# EAGLE board LED blinker (EAGLE 5.11)
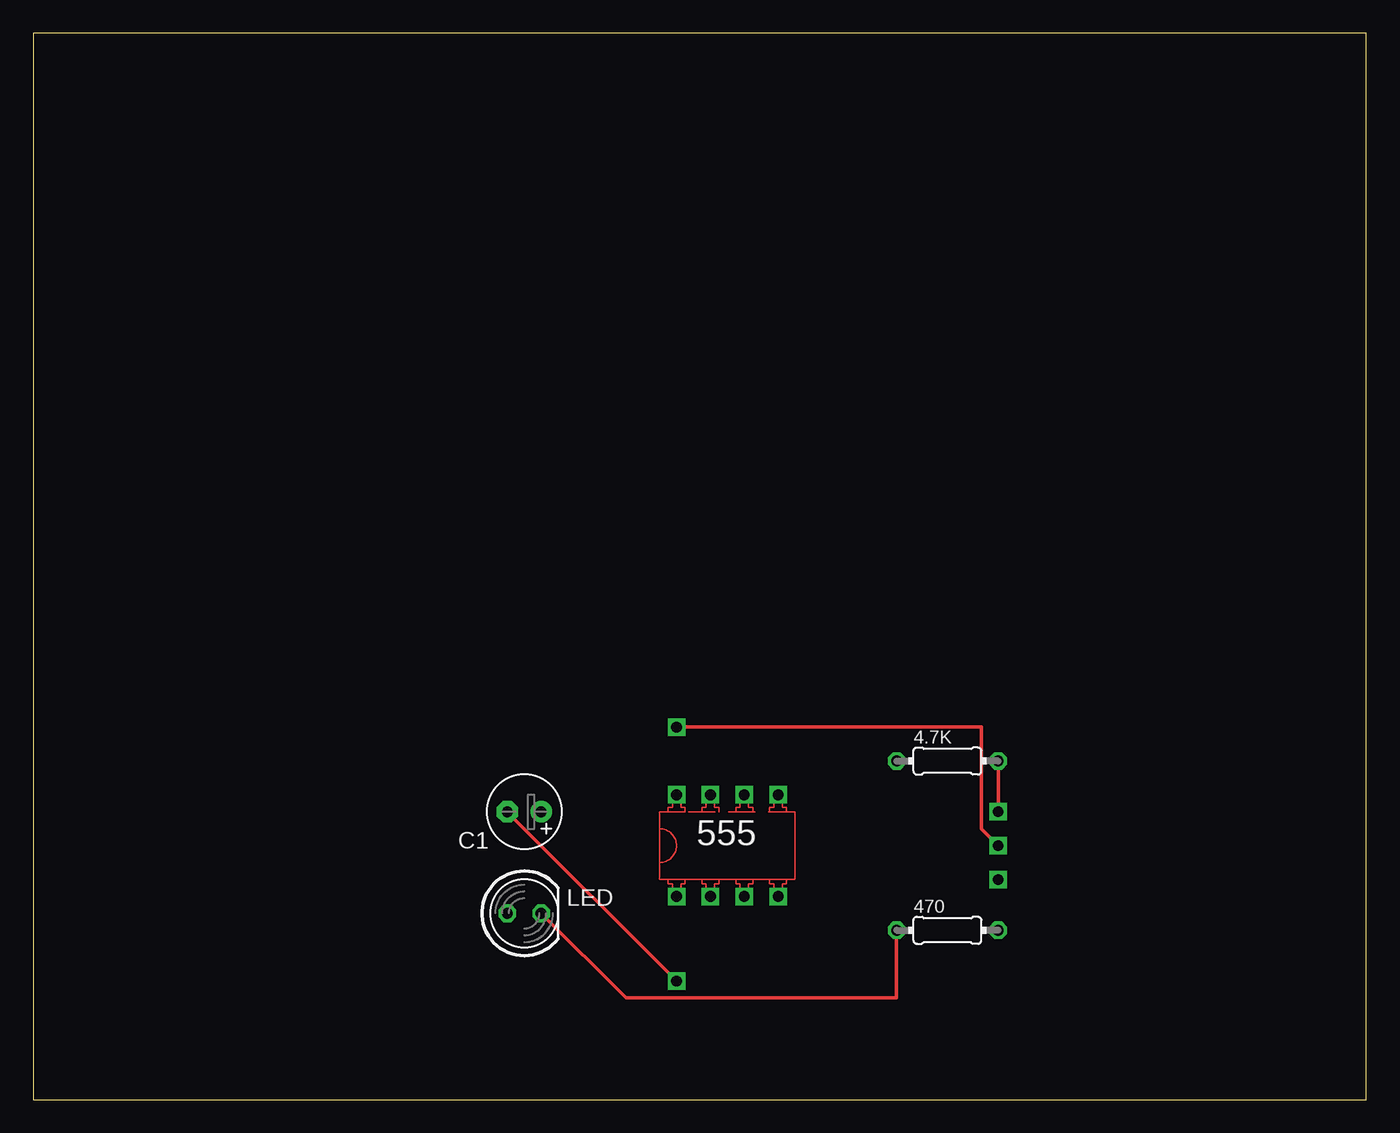
[diagram p0: board, top side]
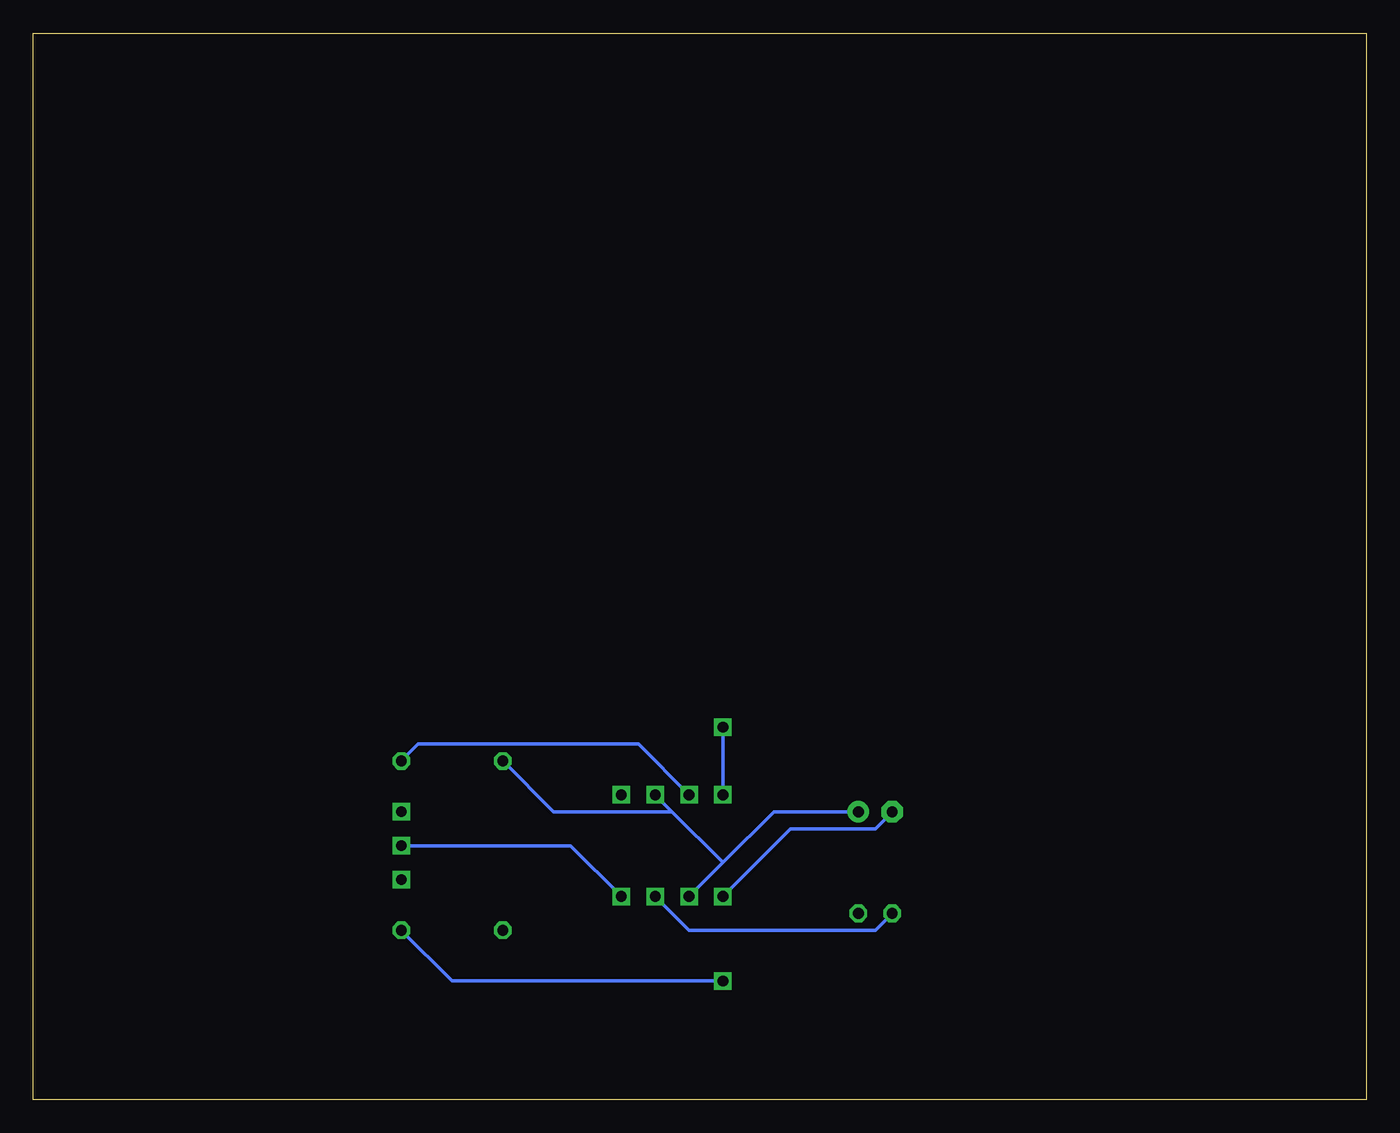
[diagram p1: board, bottom side, seen from below]

Size 100 x 80 mm. Coordinates in mm from the lower left corner, seen from the top.
Outline: 0,0 100,0 100,80 0,80 0,0
Copper layers (1*16): Top 0.035mm / dielectric 1.5mm / Bottom 0.035mm
Design rules "default": minimum track width 10mil, minimum drill 24mil, track to track 8mil, track to pad 8mil, pad to pad 8mil, via to via 8mil, smd to smd 8mil, copper to edge 40mil, drill to drill 8mil, minimum pad ring 10mil, minimum via ring 8mil, stop-mask expansion 4mil, vias tented up to drill 0mil, thermal gap 10mil

## Footprints (pad centres in the part's own frame; a part is rotated, then mirrored left to right if it is on the bottom)
0204/7 = drill 0.813 octagon: 1 -3.81,0; 2 3.81,0
E2,5-6 = drill 0.813 pad 1.6 round: + -1.27,0 | drill 0.813 pad 1.6 octagon: - 1.27,0
LED5MM = drill 0.813 octagon: A -1.27,0; K 1.27,0
POT = drill 0.8 square: 0 2.54,-1.27; 1 0,-1.27; 2 -2.54,-1.27
555 = drill 0.8 square: 1 -10.16,-2.54; 2 -7.62,-2.54; 3 -5.08,-2.54; 4 -2.54,-2.54; 5 -2.54,5.08; 6 -5.08,5.08; 7 -7.62,5.08; 8 -10.16,5.08
GND = drill 0.8 square: P$1 0,0
+5V = drill 0.8 square: P$1 0,0

## Placement (x,y rotation side)
4.7K  [0204/7]  68.58,25.4 0 top
470  [0204/7]  68.58,12.7 0 top
C1  10-47uf  [E2,5-6]  36.83,21.59 180 top
LED  [LED5MM]  36.83,13.97 0 top
P1  10K  [POT]  73.66,19.05 270 top
U$1  555  [555]  58.42,17.78 0 top
U$2  GND  [GND]  48.26,8.89 0 top
U$3  +5V  [+5V]  48.26,27.94 0 top

## Library data of the parts
4.7K 470 C1 = rcl
LED = led
P1 = 001 Custom Lib.; RESISTANCE: value here
U$1 = 001 Custom Lib.; AWESOMENESS: Infinity
U$2 = 001 Custom Lib.
U$3 = 001 Custom Lib.; VALUE: +5v

## Nets
N$1: 4.7K.1 C1.+ U$1.2 U$1.6
N$2: 4.7K.2 P1.2 U$1.7
N$4: 470.2 C1.- U$1.1 U$2.P$1
N$5: P1.1 U$1.4 U$1.8 U$3.P$1
N$6: 470.1 LED.K
N$7: LED.A U$1.3

## Tracks (layer width: path | path; a pad name or v marks a point on that pad's centre or on a via)
N$1
  Bottom 0.254: 48.26,17.78 44.45,21.59 C1.+ | 48.26,17.78 U$1.2 | 48.26,17.78 52.07,21.59 | 52.07,21.59 U$1.6 | 4.7K.1 60.96,21.59 52.07,21.59
N$2
  Top 0.254: 4.7K.2 P1.2
  Bottom 0.254: U$1.7 54.61,26.67 71.12,26.67 4.7K.2
N$4
  Top 0.254: U$2.P$1 C1.-
  Bottom 0.254: U$1.1 43.18,20.32 36.83,20.32 C1.- | 470.2 68.58,8.89 U$2.P$1
N$5
  Top 0.254: U$3.P$1 71.12,27.94 71.12,20.32 P1.1
  Bottom 0.254: U$3.P$1 U$1.8 | U$1.4 59.69,19.05 P1.1
N$6
  Top 0.254: LED.K 44.45,7.62 64.77,7.62 470.1
N$7
  Bottom 0.254: U$1.3 50.8,12.7 36.83,12.7 LED.A